# Altium PCB PowerBoard.PcbDoc
Units mm, origin at the board's own origin, x right, y up, seen from the top; angles counter-clockwise.
Board outline 152.4 x 101.6 mm, 4 copper layers (Top Layer, VBAT, GND, Bottom Layer), stack 0.778 mm thick; 147 components, 165 nets, 469 pads, 23 vias.
Unrouted connection lines stored in the file: 239.
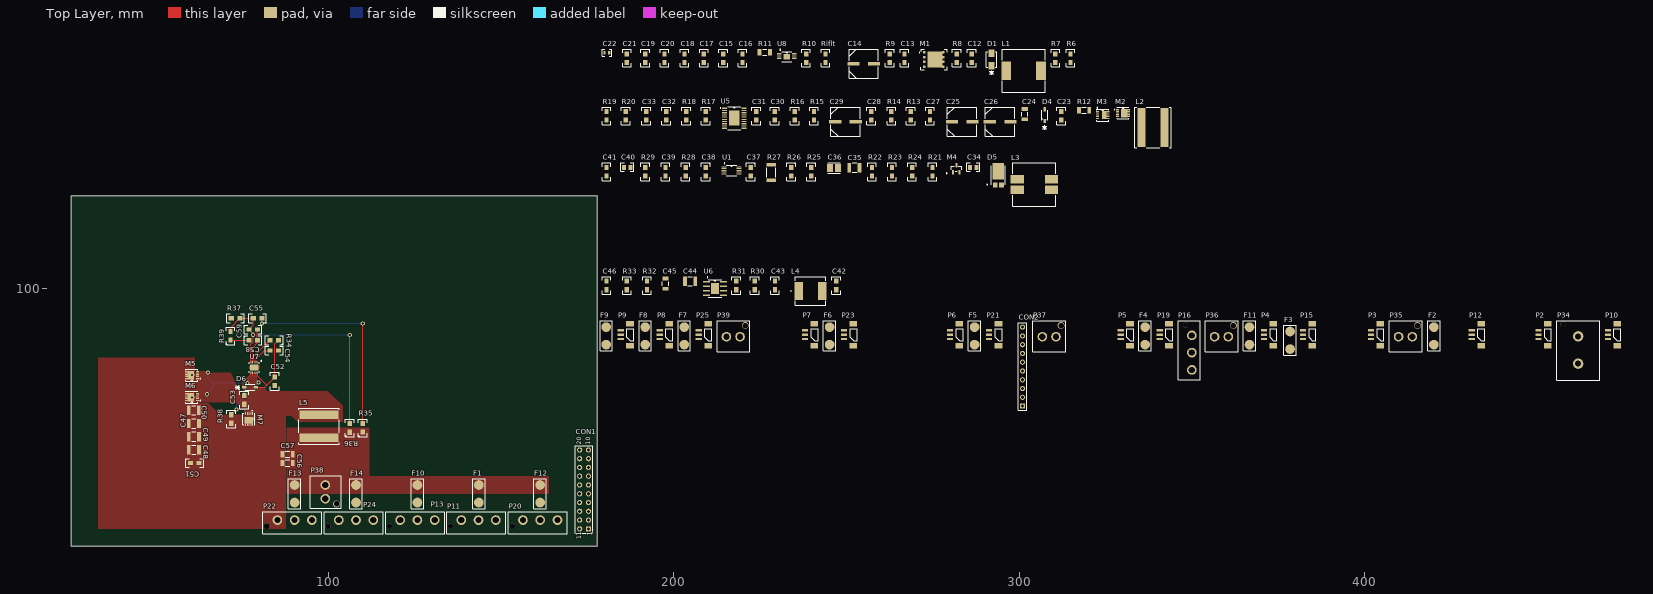
[diagram p0: Top Layer view]
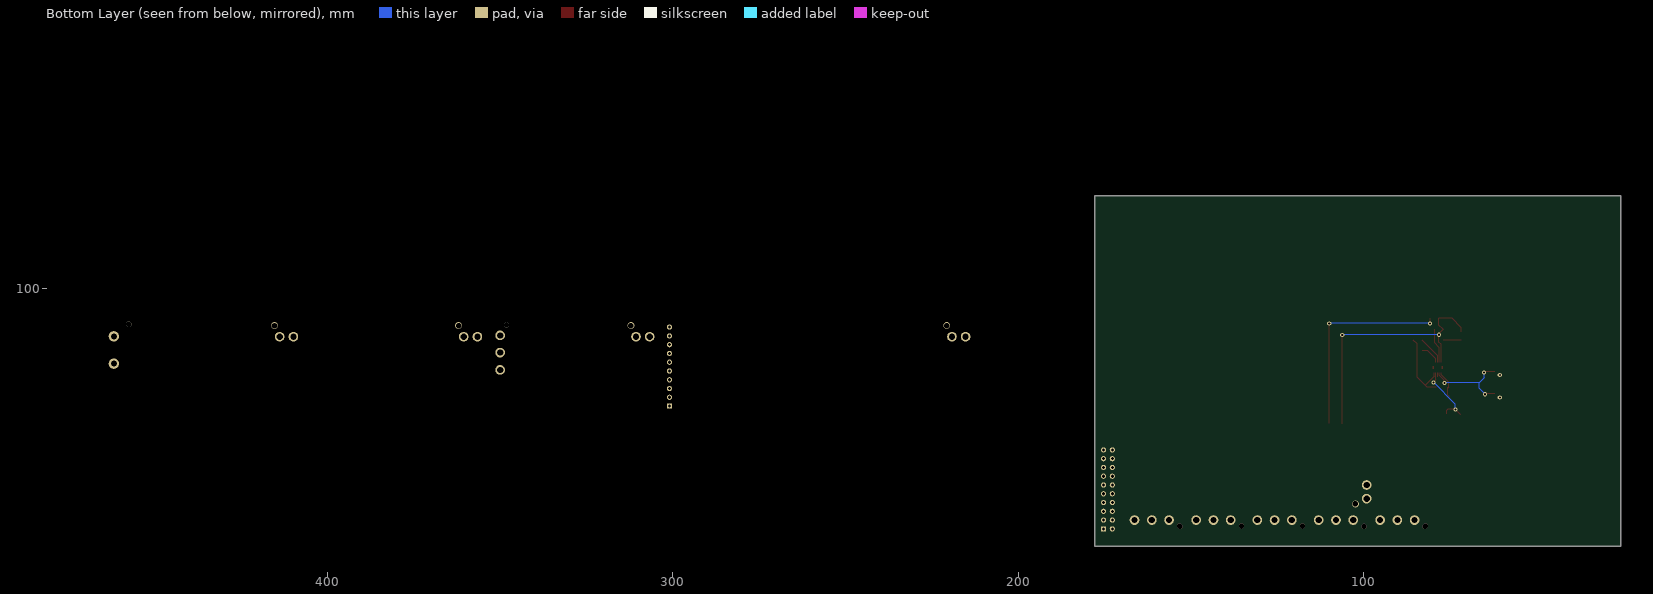
[diagram p1: Bottom Layer view, seen from below]
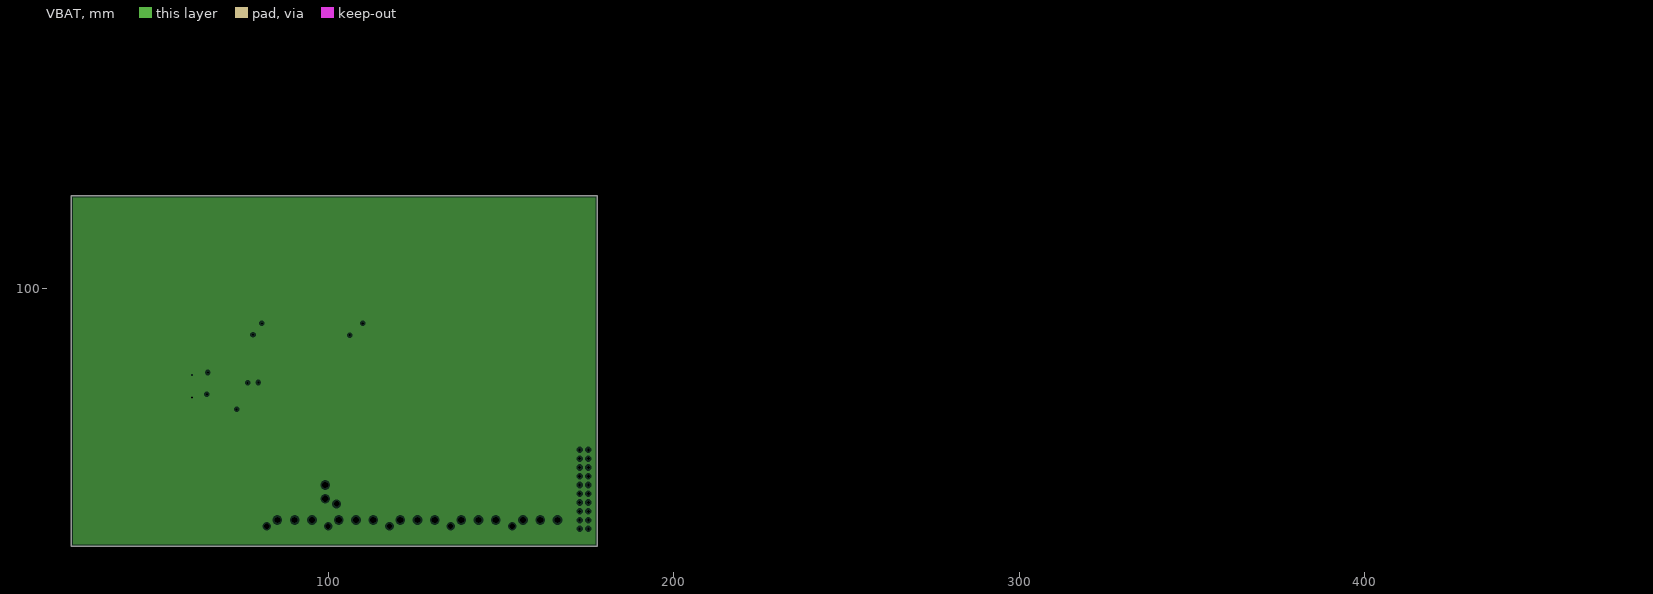
[diagram p2: VBAT, clearances drawn from the general rule]
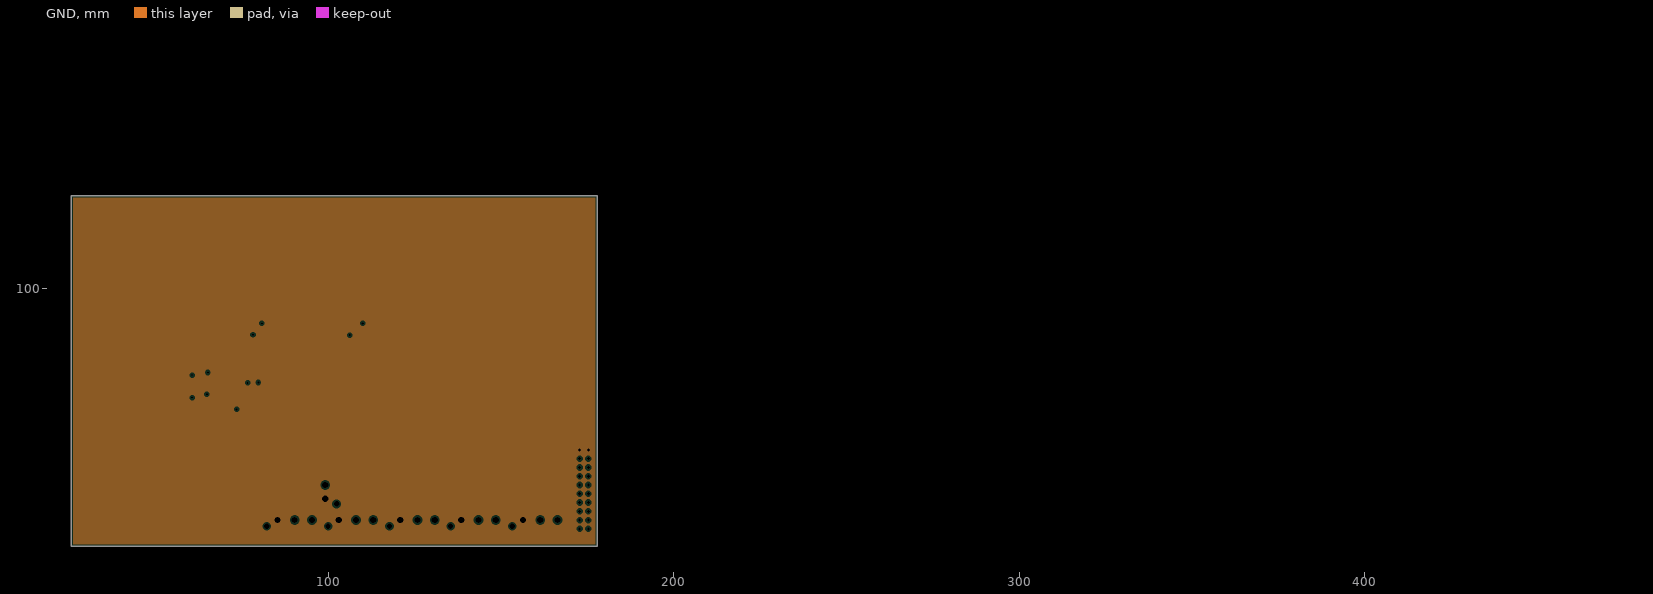
[diagram p3: GND, clearances drawn from the general rule]

## Layer stack, top to bottom
Top Solder: solder mask 0.0102, Solder Resist, Dk 3.5
Top Layer: signal copper 0.0356
Dielectric 1: core 0.254, FR-4, Dk 4.2
VBAT: plane copper 0.036, net VBAT
Dielectric 3: prepreg 0.127, Dk 4.2
GND: plane copper 0.036, net GND
Dielectric 2: core 0.254, Dk 4.2
Bottom Layer: signal copper 0.0356
Bottom Solder: solder mask 0.0102, Solder Resist, Dk 3.5

## Board outline
25.4,25.4 177.8,25.4 177.8,127 25.4,127

## Design rules (kind name [scope] priority, off if disabled: settings)
Clearance [All] p1: gap=0.2
PlaneClearance [All] p1: clearance=0.508
PlaneConnect [All] p1: planeconnectstyle=Relief reliefexpansion=0.508 reliefentries=4 reliefconductorwidth=0.254 reliefairgap=0.254
PolygonConnect [All] p1: connectstyle=Direct reliefconductorwidth=0.254 reliefentries=4 polygonreliefangle="90 Angle" airgapwidth=0.254
RoomDefinition Power24V [InComponentClass('Power24V')] p1: confinementstyle=ConfineIn formatcopy=TRUE lockcomponents=FALSE outline 178.9,156.7 316.699,156.7 316.699,172.2 178.9,172.2
RoomDefinition Power19V [InComponentClass('Power19V')] p2: confinementstyle=ConfineIn formatcopy=TRUE lockcomponents=FALSE outline 178.9,140.5 344.299,140.5 344.299,155.5 178.9,155.5
RoomDefinition Power12V [InComponentClass('Power12V')] p3: confinementstyle=ConfineIn formatcopy=TRUE lockcomponents=FALSE outline 178.9,123.7 311.599,123.7 311.599,139.3 178.9,139.3
RoomDefinition Power7V4 [InComponentClass('Power7V4')] p4: confinementstyle=ConfineIn formatcopy=TRUE lockcomponents=FALSE outline 25.511,25.241 174.011,25.241 174.011,95.491 25.511,95.491
RoomDefinition Power5V [InComponentClass('Power5V')] p5: confinementstyle=ConfineIn formatcopy=TRUE lockcomponents=FALSE outline 178.9,95 250.299,95 250.299,106.4 178.9,106.4
RoutingVias [All] p1: holewidth=0.6 width=1.2 viastyle="Through Hole" minholewidth=0.6 minwidth=1.2 maxholewidth=0.6 maxwidth=1.2
SolderMaskExpansion [All] p1: expansion=0.102
Width [All] p1: maxlimit=5 minlimit=0.254 preferedwidth=0.254
28 further rules are at their usual default settings.

## Classes and differential pairs
component class Power5V: C42 C43 C44 C45 C46 L4 R30 R31 R32 R33 U6
component class Power7V4: C47 C48 C49 C50 C51 C52 C53 C54 C55 C56 C57 C58 C59 D6 L5 M5 M6 M7 R34 R35 R36 R37 R38 R39 U7
component class Power12V: C34 C35 C36 C37 C38 C39 C40 C41 D5 L3 M4 R21 R22 R23 R24 R25 R26 R27 R28 R29 U1
component class Power19V: C23 C24 C25 C26 C27 C28 C29 C30 C31 C32 C33 D4 L2 M2 M3 R12 R13 R14 R15 R16 R17 R18 R19 R20 U5
component class Power24V: C12 C13 C14 C15 C16 C17 C18 C19 C20 C21 C22 D1 L1 M1 R6 R7 R8 R9 R10 R11 Riflt U8
component class Power: CON1 CON2 F1 F2 F3 F4 F5 F6 F7 F8 F9 F10 F11 F12 F13 F14 P2 P3 P4 P5 P6 P7 P8 P9 P10 P11 P12 P13 P15 P16 P19 P20 P21 P22 P23 P24 P25 P34 P35 P36 P37 P38 P39

## Components (designator, comment, footprint, x,y, rotation, side; value= is the part's Value field where it differs from the comment)
C12 "CC0805KRX7R9BB27" "0805 Cap" 286.299,166.8 r90 top
C13 "CC0805JRNPO9BN10" "0805 Cap" 266.799,166.8 r90 top
C14 "35SVPF82M" CAPSMT_62_E12 254.999,165.2 r0 top
C15 "GRM21BR61E475MA1" "0805 Cap" 214.3,166.8 r90 top
C16 "GRM21BR61E475MA1" "0805 Cap" 219.9,166.8 r90 top
C17 "GRM155R61A683KA0" "0805 Cap" 208.7,166.8 r90 top
C18 "GMK212B7105KG-T" "0805 Cap" 203.1,166.8 r90 top
C19 "EMK212B7474KD-T" "0805 Cap" 191.7,166.8 r90 top
C20 "CC0805JRNPO9BN15" "0805 Cap" 197.3,166.8 r90 top
C21 "CC0805JRNPO9BN10" "0805 Cap" 186.4,166.8 r90 top
C22 "C1608X5R1C105K" 1608 180.6,168.4 r0 top
C23 "C0805C224K5RACTU" "0805 Cap" 312.199,150.1 r90 top
C24 "C3216JB1E476M" 1206 301.599,150.6 r90 top
C25 "25SVPF180M" CAPSMT_62_E12 283.499,148.4 r0 top
C26 "25SVPF180M" CAPSMT_62_E12 294.499,148.4 r0 top
C27 "GRM21BC81E475KA1" "0805 Cap" 274.199,150.1 r90 top
C28 "CL21C431JBANNNC" "0805 Cap" 257.199,150.1 r90 top
C29 "20SVPF390M" CAPSMT_62_E12 249.7,148.4 r0 top
C30 "GRM188R71C474KA8" "0805 Cap" 229.2,150.1 r90 top
C31 "GRM216R71H103KA0" "0805 Cap" 223.9,150.1 r90 top
C32 "TMK212BJ474KD-T" "0805 Cap" 197.8,150.1 r90 top
C33 "GRM155R61A154KE1" "0805 Cap" 192,150.1 r90 top
C34 "GRM21BR61E475MA1" 0805 286.699,135.2 r0 top
C35 "GRM32ER61C226KE2" 1210 252.299,135.1 r0 top
C36 "TPSB226K020R0400" 3528-21 246.4,135 r0 top
C37 "GRM1555C1E301JA0" "0805 Cap" 222.3,133.9 r90 top
C38 "GRM155R61C104KA8" "0805 Cap" 209.2,133.9 r90 top
C39 "GRM155R71C224KA1" "0805 Cap" 197.6,133.9 r90 top
C40 "CC0805KRX7R9BB56" 0805 186.5,135.2 r0 top
C41 "C0603C0G1E110G" "0805 Cap" 180.5,133.9 r90 top
C42 "C1005X5R1A104K" "0805 Cap" 247,101 r90 top
C43 "GRM1555C1E5R1CA0" "0805 Cap" 229.3,101 r90 top
C44 "GRM32ER61E226KE1" 1210 204.7,102.2 r0 top
C45 "C3216X6S1A476M" 1206 197.6,101.5 r90 top
C46 "GRM155R61A474KE1" "0805 Cap" 180.5,101 r90 top
C47 "GRM32ER61E226KE1" 1210 60.985,61.001 r0 top
C48 "GRM32ER61E226KE1" 1210 60.985,53.381 r0 top
C49 "GRM32ER61E226KE1" 1210 60.985,57.191 r0 top
C50 "GRM32ER61E226KE1" 1210 60.985,64.811 r0 top
C51 "GRM188R61E105KA1" "0805 Cap" 61.234,49.571 r180 top
C52 "GRM188R61A225KE3" "0805 Cap" 84.411,73.231 r90 top
C53 "08053C104KAT2A" "0805 Cap" 75.554,67.821 r90 top
C54 "GRM033R71C332KA8" "0805 Cap" 84.261,82.131 r180 top
C55 "GRM155R71H182KA0" "0805 Cap" 79.431,91.481 r0 top
C56 "C3216X6S1A476M" 1206 88.113,49.571 r180 top
C57 "C3216X6S1A476M" 1206 88.113,52.111 r180 top
C58 "CC0805KRX7R9BB15" "0805 Cap" 78.161,85.131 r180 top
C59 "GRM1555C1H361JA0" "0805 Cap" 78.161,88.231 r180 top
CON1 "Header 10X2A" HDR2X10_CEN 175.26,30.48 r90 top
CON2 "Header 10" HDR1X10 300.99,66.04 r90 top
D1 "B240A-13-F" SMA 291.999,166.4 r90 top
D4 "MBR130T1G" SOD-123 307.399,150.3 r90 top
D5 "PDS760-13" PowerDI5 293.999,132.9 r0 top
D6 "MBR0540T1G" SOD-123 77.23,71.471 r0 top
F1 "RSTA 2-BULK" 56400001009 143.51,43.18 r270 top
F2 "RSTA 2-BULK" 56400001009 420.11,83.82 r90 top
F3 "RSTA 2-BULK" 56400001009 378.46,87.63 r270 top
F4 "RSTA 2-BULK" 56400001009 336.51,83.82 r90 top
F5 "RSTA 2-BULK" 56400001009 287.11,83.82 r90 top
F6 "RSTA 2-BULK" 56400001009 245.11,83.82 r90 top
F7 "RSTA 2-BULK" 56400001009 203.01,83.82 r90 top
F8 "RSTA 2-BULK" 56400001009 191.71,83.82 r90 top
F9 "RSTA 2-BULK" 56400001009 180.41,83.82 r90 top
F10 "RSTA 2-BULK" 56400001009 125.73,43.18 r270 top
F11 "RSTA 2-BULK" 56400001009 366.71,83.82 r90 top
F12 "RSTA 2-BULK" 56400001009 161.29,43.18 r270 top
F13 "RSTA 2-BULK" 56400001009 90.17,43.18 r270 top
F14 "RSTA 2-BULK" 56400001009 107.95,43.18 r270 top
L1 "SRR1210-220M" SRR1210 301.299,163.2 r0 top
L2 "XAL1010-682MEB" XAL1010 338.799,146.7 r0 top
L3 "DRQ127-3R3-R" DRQ127 304.399,130.2 r0 top
L4 "IHLP3232DZER3R3M" IHLP-3232DZ 239.6,99.4 r0 top
L5 "XAL1010-681MEB" XAL1010 97.231,60.214 r270 top
M1 "CSD17551Q5A" TRANS_NexFET_Q5A 275.299,166.4 r0 top
M2 "CSD16340Q3" TRANS_NexFET_Q3 330.099,150.9 r0 top
M3 "BSZ035N03MS G" PG-TSDSON-8 324.199,150.3 r0 top
M4 "SI2316BDS-T1-E3" SOT-23 281.799,134.8 r0 top
M5 "CSD16340Q3" TRANS_NexFET_Q3 60.401,74.971 r180 top
M6 "CSD16340Q3" TRANS_NexFET_Q3 60.401,68.621 r180 top
M7 "CSD16340Q3" TRANS_NexFET_Q3 76.911,62.271 r270 top
P2 "DF13-3" DF13-3 450.41,86.72 r90 top
P3 "DF13-3" DF13-3 401.91,86.72 r90 top
P4 "DF13-3" DF13-3 370.91,86.72 r90 top
P5 "DF13-3" DF13-3 329.41,86.72 r90 top
P6 "DF13-3" DF13-3 280.01,86.72 r90 top
P7 "DF13-3" DF13-3 238.01,86.72 r90 top
P8 "DF13-3" DF13-3 195.91,86.72 r90 top
P9 "DF13-3" DF13-3 184.61,86.72 r90 top
P10 "DF13-3" DF13-3 470.51,86.72 r90 top
P11 "DF5A-3" DF5A-3 143.43,33.02 r180 top
P12 "DF13-3" DF13-3 431.11,86.72 r90 top
P13 "DF5A-3" DF5A-3 125.73,33.02 r180 top
P15 "DF13-3" DF13-3 382.21,86.72 r90 top
P16 "DF5A-3" DF5A-3 350.01,81.52 r90 top
P19 "DF13-3" DF13-3 340.71,86.72 r90 top
P20 "DF5A-3" DF5A-3 161.29,33.02 r180 top
P21 "DF13-3" DF13-3 291.31,86.72 r90 top
P22 "DF5A-3" DF5A-3 90.17,33.02 r180 top
P23 "DF13-3" DF13-3 249.31,86.72 r90 top
P24 "DF5A-3" DF5A-3 107.95,33.02 r180 top
P25 "DF13-3" DF13-3 207.21,86.72 r90 top
P34 "DF22-2" DF22-2 461.91,78.32 r90 top
P35 "DF22-2" DF63 409.91,86.12 r0 top
P36 "DF22-2" DF63 356.61,86.12 r0 top
P37 "DF22-2" DF63 306.71,86.12 r0 top
P38 "DF22-2" DF63 99.06,43.18 r270 top
P39 "DF22-2" DF63 215.21,86.12 r0 top
R6 "CRCW04021K40FKED" "0805 Resistor" 314.899,166.8 r90 top
R7 "RR1220P-473-D" "0805 Resistor" 310.499,166.8 r90 top
R8 "CRCW040256K2FKED" "0805 Resistor" 281.899,166.8 r90 top
R9 "CRCW040217R8FKED" "0805 Resistor" 262.499,166.8 r90 top
R10 "CRCW0402316KFKED" "0805 Resistor" 238.3,166.8 r90 top
R11 "CSR1206FK25L0" 1206 226.3,168.5 r0 top
R12 "PRL1632-R005-F-T" 1206 318.799,151.7 r0 top
R13 "CRCW08053R01FKEA" "0805 Resistor" 268.599,150.1 r90 top
R14 "RR1220P-473-D" "0805 Resistor" 262.999,150.1 r90 top
R15 "CRCW040249K9FKED" "0805 Resistor" 240.6,150.1 r90 top
R16 "CRCW040239K2FKED" "0805 Resistor" 235,150.1 r90 top
R17 "CRCW04023K16FKED" "0805 Resistor" 209.2,150.1 r90 top
R18 "CRCW040210K0FKED" "0805 Resistor" 203.6,150.1 r90 top
R19 "CRCW040286K6FKED" "0805 Resistor" 180.5,150.1 r90 top
R20 "CRCW040219K6FKED" "0805 Resistor" 186.1,150.1 r90 top
R21 "CRCW040286K6FKED" "0805 Resistor" 274.899,133.9 r90 top
R22 "CRCW040215K0FKED" "0805 Resistor" 257.399,133.9 r90 top
R23 "CRCW04022K21FKED" "0805 Resistor" 263.199,133.9 r90 top
R24 "CRCW0402100RFKED" "0805 Resistor" 268.999,133.9 r90 top
R25 "CRCW040213K3FKED" "0805 Resistor" 239.8,133.9 r90 top
R26 "CRCW040210K0FKED" "0805 Resistor" 234,133.9 r90 top
R27 "CSRN2010FK50L0" 2010 228.2,133.7 r90 top
R28 "CRCW04022K37FKED" "0805 Resistor" 203.4,133.9 r90 top
R29 "CRCW040273K2FKED" "0805 Resistor" 191.7,133.9 r90 top
R30 "CRCW040210K0FKED" "0805 Resistor" 223.4,101 r90 top
R31 "CRCW0402365KFKED" "0805 Resistor" 218.1,101 r90 top
R32 "CRCW0402100KFKED" "0805 Resistor" 192.2,101 r90 top
R33 "CRCW040249K9FKED" "0805 Resistor" 186.4,101 r90 top
R34 "CRCW0402100KFKED" "0805 Resistor" 84.261,85.131 r0 top
R35 "CRCW0402261RFKED" "0805 Resistor" 109.931,59.751 r270 top
R36 "CRCW040210K0FKED" "0805 Resistor" 106.121,59.711 r270 top
R37 "CRCW0402887RFKED" "0805 Resistor" 73.081,91.481 r0 top
R38 "CRCW04024K42FKED" "0805 Resistor" 71.831,62.291 r90 top
R39 "CRCW04021K21FKED" "0805 Resistor" 71.611,86.381 r270 top
Riflt "CRCW04021K00FKED" "0805 Resistor" 243.9,166.8 r90 top
U1 "LM5022MM/NOPB" MUB10A 216.7,134.3 r0 top
U5 "LM5122MH/NOPB" MXA20A 217.5,149.4 r0 top
U6 "TPS56528DDAR" R-PDSO-G8 211.9,100.1 r0 top
U7 "TPS40304DRCR" S-PVSON-N10 78.486,77.216 r270 top
U8 "TPS40210DGQR" S-PDSO-G10 232.7,167.2 r0 top

## Footprints (in the part's own frame and the unit in brackets; to place one, negate y for a bottom-side part, rotate by r counter-clockwise, add the part's x,y. Pads: shape width x height; smd on the part's side, far side on the other; paste and mask are expansions set on the pad)
0805 [mil]
  rect 44x57 smd: 1(-35.5,0) 2(35.5,0)
  silkscreen extent -75,-45 75,50
"0805 Cap" [mm] "0805 Capacitor"
  rect 1.5x1.25 smd: 1(1.25,0) 2(-1.25,0)
  silkscreen extent -2.54,-1.27 2.54,1.27, body extent -1,-0.63 1.1,0.63, height 0.9
"0805 Resistor" [mm] "0805 Resistor"
  rect 1.5x1.25 smd: 1(1.25,0) 2(-1.25,0)
  silkscreen extent -2.54,-1.27 2.54,1.27, body extent -1,-0.63 1.1,0.63, height 0.6
1206 [mil]
  rect 44x71 smd: 1(-59,0) 2(59,0)
  silkscreen extent -24,-36 24,36
1210 [mil]
  rect 44x106 smd: 1(-59,0) 2(59,0)
  silkscreen extent -24,-53 24,53
1608 [mil]
  rect 26x38 smd: 1(-27.5,0) 2(27.5,0)
  silkscreen extent -55,-40 55,40
2010 [mil]
  rect 40x106 smd: 1(-88.5,0) 2(88.5,0)
  silkscreen extent -55,-53 55,53
3528-21 [mil]
  rect 69x91 smd: 1(-44.5,0) 2(44.5,0)
  silkscreen extent -73,-59 73,59
56400001009 [mm] "FUSE HOLDER RADIAL 250V 6.3A SMD"
  round 2.8 smd: 1(0,0) 2(5.08,0)
  silkscreen extent -1.8,-1.8 6.9,1.8
CAPSMT_62_E12 [mil]
  rect 140x43 smd: 1(-117,0) 2(117,0)
  silkscreen extent -168,-168 168,168
DF5A-3 [mm]
  round 2.8 hole 1.8: 1(-5,0) 2(0,0) 3(5,0)
  silkscreen extent -7.9,-2.4 9.2,4
DF13-3 [mm] "Part number: DF13C-3P-1.25V(21)"
  rect 0.7x1.8 smd: 1(-1.25,0) 2(0,0) 3(1.25,0)
  rect 1.6x2.2 smd: NC(-3.2,-2.7) NC(3.2,-2.7)
  silkscreen extent -1.75,-3.75 1.75,-1.75
DF22-2 [mm] "CONN HEADER 2POS 7.92MM PCB TIN"
  round 3 hole 1.7: 1(0,0) 2(7.92,0)
  silkscreen extent -4.75,-6.22 12.47,6.25
DF63 [mm]
  round 2.8 hole 1.8: 1(0,0) 2(3.96,0)
  silkscreen extent -2.7,-4.4 6.8,4.6
DRQ127 [mil]
  rect 152x98 smd: 1(-196,59) 2(-196,-59) 3(196,-59) 4(196,59)
  silkscreen extent -246,-246 246,246
HDR1X10 [mm] "Connector; Header; 10 Position"
  rect 1.5x1.5 hole 0.9: 1(0,0)
  round 1.5 hole 0.9: 2(2.54,0) 3(5.08,0) 4(7.62,0) 5(10.16,0) 6(12.7,0) 7(15.24,0) 8(17.78,0) 9(20.32,0) 10(22.86,0)
  silkscreen extent -1.27,-1.27 24.13,1.27
HDR2X10_CEN [mm] "Connector; Header; 10x2 Position"
  rect 1.5x1.5 hole 0.9: 1(0,0)
  round 1.5 hole 0.9: 2(2.54,0) 3(5.08,0) 4(7.62,0) 5(10.16,0) 6(12.7,0) 7(15.24,0) 8(17.78,0) 9(20.32,0) 10(22.86,0) 11(0,2.54) 12(2.54,2.54) 13(5.08,2.54) 14(7.62,2.54) 15(10.16,2.54) 16(12.7,2.54) 17(15.24,2.54) 18(17.78,2.54) 19(20.32,2.54) 20(22.86,2.54)
  silkscreen extent -1.27,-1.27 24.13,3.81
IHLP-3232DZ [mil]
  rect 95x203 smd: 1(-133.5,0) 2(133.5,0)
  silkscreen extent -228,-162 175,162
MUB10A [mil]
  rect 54x13 smd: 1(-86.5,39.37) 2(-86.5,19.69) 3(-86.5,0) 4(-86.5,-19.68) 5(-86.5,-39.37) 6(86.5,-39.37) 7(86.5,-19.68) 8(86.5,0) 9(86.5,19.69) 10(86.5,39.37)
  silkscreen extent -85,-61 61,85
MXA20A [mil]
  rect 56x14 smd: 1(-112,115.16) 2(-112,89.57) 3(-112,63.98) 4(-112,38.39) 5(-112,12.8) 6(-112,-12.8) 7(-112,-38.39) 8(-112,-63.98) 9(-112,-89.57) 10(-112,-115.16) 11(112,-115.16) 12(112,-89.57) 13(112,-63.98) 14(112,-38.39) 15(112,-12.8) 16(112,12.8) 17(112,38.39) 18(112,63.98) 19(112,89.57) 20(112,115.16)
  rect 124x171 smd: 21(0,0)
  silkscreen extent -160,-130 74,130
PG-TSDSON-8 [mil]
  rect 31x13 smd paste-6.5: 1(-59.5,38.39) 2(-59.5,12.8) 3(-59.5,-12.8) 4(-59.5,-38.39) 5(59.5,-38.39) 6(59.5,-12.8) 7(59.5,12.8) 8(59.5,38.39)
  rect 52x90 smd paste-26 mask+1: 9(18,0)
  Top Layer region: -75,0 -75,0 -75,0 -75,0
  silkscreen extent -67,-67 67,90
PowerDI5 [mil]
  rect 55x55 smd: 1(-36.22,-112.5) 2(36.22,-112.5)
  rect 132x191 smd: 3(0,44.5)
  silkscreen extent -134,-111 80,108
R-PDSO-G8 [mil]
  rect 78x18.14 smd: 1(-97,75) 2(-97,25) 3(-97,-25) 4(-97,-75) 5(97,-75) 6(97,-25) 7(97,25) 8(97,75)
  rect 94x122 smd paste-60.5: 9(0,0)
  silkscreen extent -90,-98 78,135
S-PDSO-G10 [mm]
  rect 1.411x0.27 smd: 1(-2.175,1) 2(-2.175,0.5) 3(-2.175,0) 4(-2.175,-0.5) 5(-2.175,-1) 6(2.175,-1) 7(2.175,-0.5) 8(2.175,0) 9(2.175,0.5) 10(2.175,1)
  rect 1.88x1.57 smd paste-0.927: 11(0,0)
  silkscreen extent -2.03,-1.5 1.5,2.16
S-PVSON-N10 [mm]
  rect 0.8x0.23 smd: 1(-1.5,1) 2(-1.5,0.5) 3(-1.5,0) 4(-1.5,-0.5) 5(-1.5,-1) 6(1.5,-1) 7(1.5,-0.5) 8(1.5,0) 9(1.5,0.5) 10(1.5,1)
  rect 1.75x2.4 smd paste-1.187: 11(0,0)
  Top Layer region: -0.365,1.2 0.365,1.2 0.365,1.5 0.135,1.5 0.135,1.2 -0.135,1.2 -0.135,1.5 -0.365,1.5
  Top Layer region: -0.365,-1.2 0.365,-1.2 0.365,-1.5 0.135,-1.5 0.135,-1.2 -0.135,-1.2 -0.135,-1.5 -0.365,-1.5
  silkscreen extent -2.03,-1.5 1.5,2.16
SMA [mil]
  rect 86x64 smd: 1(-73,0) 2(73,0)
  silkscreen extent -174,-58 90,58
SOD-123 [mil]
  rect 48x30 smd: 1(-66,0) 2(66,0)
  silkscreen extent -165,-36 56,36
SOT-23 [mil]
  rect 22x50 smd: 1(-37.5,-41) 2(37.5,-41) 3(0,41)
  silkscreen extent -115,-57 60,28
SRR1210 [mil]
  rect 110x209 smd: 1(-198.5,0) 2(198.5,0)
  silkscreen extent -246,-246 246,246
TRANS_NexFET_Q3 [mil]
  rect 34x16 smd: 1(-62,38.39) 2(-62,12.8) 3(-62,-12.8) 4(-62,-38.39) 5(62,-38.39) 6(62,-12.8) 7(62,12.8) 8(62,38.39)
  rect 74.8x96.46 smd: 9(13.46,0)
  Top Layer region: 67,0 67,0 67,0 67,0
  silkscreen extent -99,-67 67,67
TRANS_NexFET_Q5A [mm]
  rect 0.8x0.7 smd paste-0.387: 1(-2.752,2.055) 2(-2.752,0.685) 3(-2.752,-0.685) 4(-2.752,-2.055) 5(2.752,-2.055) 6(2.752,-0.685) 7(2.752,0.685) 8(2.752,2.055)
  rect 4.3x4.56 smd paste-2.267 mask+0.025: 9(0.3,0)
  silkscreen extent -4.22,-2.92 3.81,2.92
XAL1010 [mil]
  rect 94x445 smd: 1(-131,0) 2(131,0)
  silkscreen extent -207,-232 207,232

## Part data
C12 C13 C14 C15 C16 C17 C18 C19 C20 C21 C22 C23 C24 C25 C26 C27 C28 C29 C30 C31 C32 C33 C34 C35 C36 C37 C38 C39 C40 C41 C42 C43 C44 C45 C46 C47 C48 C49 C50 C51 C52 C54 C55 C58 C59 D1 D4 D5 L1 L2 L3 L4 L5 M1 M2 M3 M4 M5 M6 M7 R6 R7 R8 R9 R10 R11 R12 R13 R14 R15 R16 R17 R18 R19 R20 R21 R22 R23 R24 R25 R26 R27 R28 R29 R30 R31 R32 R33 Riflt U1 U5 U6 U8: "Imported"
CON1: "Header, 10-Pin, Dual row"
CON2: "Header, 10-Pin"
F1 F2 F3 F4 F5 F6 F7 F8 F9 F10 F11 F12 F13 F14: "FUSE 2A 250/277V RADIAL"
P34 P35 P36 P37 P38 P39: "CONN HEADER 2POS 7.92MM PCB TIN"

## Via types
v1: diameter 1.2, hole 0.6, Top Layer to Bottom Layer, 11 vias
v2: diameter 1.5, hole 1.5, Top Layer to Bottom Layer, 6 vias
v3: diameter 2, hole 1.6, Top Layer to Bottom Layer, 5 vias
v4: diameter 1.6, hole 1.6, Top Layer to Bottom Layer, 1 vias

## Nets (pads, with @x,y where several pads share a name; then routed paths per layer and width w, separated by ;. In a path a pad name is that pad's centre, name@x,y a point inside that pad or via, vN(x,y) a via of type N, cw(c..) or ccw(c..) an arc to the next point about the centre after c; other vN are vias at no path point)
3V3: 
5V: 
5V-HC: C43.1 C45.1 F2.2 F3.1 F4.1 F5.1 F6.1 F7.1 F8.1 F9.1 L4.2 P39.1 R31.1
7V4: C56.1 C57.1 F1.1 F10.1 F11.1 F12.1 F13.1 F14.1 L5.2 P38.1 R35.1 R36.1
12V: C35.1 D5.3 P37.1 R21.1
19V: C24.1 C25.1 C26.1 M2.5 M2.6 M2.7 M2.8 M2.9 P36.1 R14.1
24V: C14.1 C18.1 D1.1 P35.1 R7.1
ENC_A0: 
ENC_A1: 
ENC_A2: 
ENC_A3: 
ENC_A4: 
ENC_A5: 
ENC_B0: 
ENC_B1: 
ENC_B2: 
ENC_B3: 
ENC_B4: 
ENC_B5: 
GND: C14.2 C15.2 C16.2 C17.2 C18.2 C19.2 C20.2 C21.2 C22.2 C24.2 C25.2 C26.2 C27.1 C29.2 C30.2 C32.2 C33.2 C35.2 C36.2 C37.2 C38.2 C39.2 C44.2 C45.2 C46.2 C47.2 C48.2 C49.2 C50.2 C51.2 C52.2 C54.2 C56.2 C57.2 CON1.10 CON1.20 CON2.10 L3.2 M3.1 M3.2 M3.3 M7.5 M7.6 M7.7 M7.8 M7.9 P2.3 P3.3 P4.3 P5.3 P6.3 P7.3 P8.3 P9.3 P10.3 P11.3 P12.3 P13.3 P15.3 P16.3 P19.3 P20.3 P21.3 P22.3 P23.3 P24.3 P25.3 P34.2 P35.2 P36.2 P37.2 P38.2 P39.2 R6.2 R11.1 R17.2 R18.1 R19.1 R20.1 R22.1 R26.2 R27.2 R28.1 R33.2 R37.2 R38.2 U1.6 U5.2 U5.9 U5.13 U5.15 U5.21 U6.5 U6.9 U7.11 U8.6 U8.11
M\C\L\R\: 
NetC6_2: 
NetC7_2: 
NetC8_2: 
NetC9_1: 
NetC10_1: 
NetC12_1: C12.1 C13.1 U8.4
NetC12_2: C12.2 R8.1
NetC13_2: C13.2 R6.1 R7.2 R8.2 U8.5
NetC17_1: C17.1 U8.2
NetC20_1: C20.1 Riflt.2 U8.7
NetC21_1: C21.1 R10.2 U8.1
NetC22_1: C22.1 U8.9
NetC23_1: C23.1 D4.1 U5.20
NetC23_2: C23.2 L2.2 M2.1 M2.2 M2.3 M3.5 M3.6 M3.7 M3.8 M3.9 U5.18
NetC27_2: C27.2 D4.2 U5.17
NetC28_1: C28.1 C31.1 R14.2 R17.1 U5.10
NetC28_2: C28.2 R16.1 U5.11
NetC30_1: C30.1 R13.1 U5.5
NetC31_2: C31.2 R16.2
NetC32_1: C32.1 U5.14
NetC33_1: C33.1 U5.7
NetC34_1: C34.1 D5.1 D5.2 L3.4
NetC34_2: C34.2 L3.3 M4.3
NetC37_1: C37.1 R23.2 R24.1
NetC38_1: C38.1 U1.4
NetC39_1: C39.1 U1.10
NetC40_1: C40.1 C41.1 R21.2 R26.1 U1.2
NetC40_2: C40.2 R29.2
NetC41_2: C41.2 R29.1 U1.3
NetC42_1: C42.1 U6.7
NetC42_2: C42.2 L4.1 U6.6
NetC43_2: C43.2 R31.2 R33.1 U6.2
NetC46_1: C46.1 R32.1 U6.3
NetC52_1: C52.1 D6.2 R34.1 U7.10 | length 22.7
  Top Layer w0.254: D6.2 81.554,71.471 82.154,72.071 ; U7.10 79.486,74.739 82.154,72.071 ; R34.1 84.411,84.031 C52.1 84.411,74.328 82.154,72.071
NetC53_1: C53.1 D6.1 U7.6 | length 8.5
  Top Layer w0.254: C53.1@75.184,68.581 75.184,68.871 75.554,69.241 D6.1@75.554,71.248 ; D6.1 D6.1@75.554,71.248 ; U7.6 77.486,75.106 75.354,72.974 75.354,71.448 D6.1@75.554,71.248
NetC53_2: C53.2 L5.1 M5.1 M5.2 M5.3 M6.1 M6.2 M6.3 M7.1 M7.2 M7.3 U7.8 | length 1.2
  Top Layer w0.3: 78.486,74.503 U7.8
NetC54_1: C54.1 U7.2 | length 6.1
  Top Layer w0.254: U7.2 78.986,79.806 81.311,82.131 C54.1
NetC55_1: C55.1 R35.2 | length 59.7
  Top Layer w0.254: v1(80.681,89.981) C55.1 ; R35.2 v1@109.931,90
  Bottom Layer w0.254: v1(80.681,89.981) 109.881,89.981 v1(109.9,90)
NetC55_2: C55.2 C59.1 R36.2 R37.1 R39.2 U7.5 | length 76.4
  Top Layer w0.254: R39.2 71.611,88.761 R37.1 C55.2 78.181,89.501 C59.1 78.111,87.031 78.111,84.494 77.511,83.894 77.511,78.741 U7.5 ; R36.2 v1(106.121,86.579)
  Bottom Layer w0.254: v1(78.1,86.7) v1@106,86.7
NetC58_1: C58.1 R39.1 | length 5.3
  Top Layer w0.254: R39.1 C58.1
NetC58_2: C58.2 C59.2 U7.4 | length 10.1
  Top Layer w0.254: U7.4 77.986,82.906 79.411,84.331 C58.2 C59.2
NetD1_2: D1.2 L1.2 M1.5 M1.6 M1.7 M1.8 M1.9
NetD2_1: 
NetD3_1: 
NetF1_2: F1.2 P11.2
NetF2_1: F2.1 P2.2
NetF3_2: F3.2 P3.2
NetF4_2: F4.2 P4.2
NetF5_2: F5.2 P5.2
NetF6_2: F6.2 P6.2
NetF7_2: F7.2 P7.2
NetF8_2: F8.2 P8.2
NetF9_2: F9.2 P9.2
NetF10_2: F10.2 P13.2
NetF11_2: F11.2 P16.2
NetF12_2: F12.2 P20.2
NetF13_2: F13.2 P22.2
NetF14_2: F14.2 P24.2
NetL2_1: L2.1 R12.2 U5.3
NetM1_1: M1.1 M1.2 M1.3 R11.2 Riflt.1
NetM1_4: M1.4 R9.1
NetM2_4: M2.4 U5.19
NetM3_4: M3.4 U5.16
NetM4_1: M4.1 U1.5
NetM4_2: M4.2 R24.2 R27.1
NetM5_4: M5.4 M6.4 U7.7 | length 27.2
  Top Layer w0.254: M6.4 64.629,69.596 v1(64.754,69.471) ; M5.4 64.879,75.946 v1(65.054,75.771) ; v1(76.554,72.771) 76.554,73.474 77.986,74.906 U7.7
  Bottom Layer w0.254: v1(64.754,69.471) 66.494,71.211 66.494,72.831 ; v1(65.054,75.771) 65.054,74.271 66.494,72.831 ; v1(76.554,72.771) 66.554,72.771 66.494,72.831
NetM7_4: M7.4 R38.1 U7.9 | length 19.4
  Top Layer w0.254: R38.1 73.461,65.171 75.554,65.171 75.936,64.789 M7.4 ; U7.9 78.986,73.703 79.654,73.035 v1(79.654,72.871)
  Bottom Layer w0.254: v1(73.354,65.071) 73.354,66.571 v1(79.654,72.871)
NetP26_2: 
NetP26_3: 
NetP27_2: 
NetP27_3: 
NetR4_1: 
NetR5_1: 
NetR9_2: R9.2 U8.8
NetR15_1: R15.1 R18.2 U5.6
NetR19_2: R19.2 U5.12
NetR20_2: R20.2 U5.8
NetR22_2: R22.2 U1.9
NetR23_1: R23.1 U1.8
NetR25_1: R25.1 R28.2 U1.7
NetR30_1: R30.1 U6.1
NetR32_2: R32.2 U6.4
NetR34_2: R34.2 U7.3 | length 8.3
  Top Layer w0.254: U7.3 78.486,80.606 R34.2
NetU3_18: 
NetU3_19: 
PGEC: 
PGED: 
PWR_SA0: CON1.8 P11.1
PWR_SA1: CON1.9 P13.1
PWR_SA2: CON1.11 P16.1
PWR_SA3: CON1.12 P20.1
PWR_SA4: CON1.13 P22.1
PWR_SA5: CON1.14 P24.1
PWR_SC0: CON2.1 P2.1
PWR_SC1: CON2.2 P3.1
PWR_SC2: CON2.3 P4.1
PWR_SC3: CON2.4 P5.1
PWR_SC4: CON2.5 P6.1
PWR_SC5: CON2.6 P7.1
PWR_SC6: CON2.7 P8.1
PWR_SC7: CON2.8 P9.1
PWR_SD0: CON1.1 P10.1
PWR_SD1: CON1.2 P12.1
PWR_SD2: CON1.3 P15.1
PWR_SD3: CON1.4 P19.1
PWR_SD4: CON1.5 P21.1
PWR_SD5: CON1.6 P23.1
PWR_SD6: CON1.7 P25.1
RX0: 
RX1: 
SA0: 
SA1: 
SA2: 
SA3: 
SA4: 
SA5: 
SA6: 
SA7: 
SC0: 
SC1: 
SC2: 
SC3: 
SC4: 
SC5: 
SC6: 
SC7: 
SD0: 
SD1: 
SD2: 
SD3: 
SD4: 
SD5: 
SD6: 
SP0: 
SP1: 
SP2: 
SP3: 
SP4: 
SP5: 
SP6: 
SP7: 
TX0: 
TX1: 
VBAT: C15.1 C16.1 C19.1 C29.1 C36.1 C44.1 C47.1 C48.1 C49.1 C50.1 C51.1 L1.1 L3.1 M5.5 M5.6 M5.7 M5.8 M5.9 M6.5 M6.6 M6.7 M6.8 M6.9 P34.1 R10.1 R12.1 R13.2 R15.2 R25.2 R30.2 U1.1 U5.4 U6.8 U7.1 U8.10
  other v1: 60.5,68.5 60.5,75
pads on no net: CON1.15 CON1.16 CON1.17 CON1.18 CON1.19 CON2.9 P2.NC P3.NC P4.NC P5.NC P6.NC P7.NC P8.NC P9.NC P10.2 P10.NC P12.2 P12.NC P15.2 P15.NC P19.2 P19.NC P21.2 P21.NC P23.2 P23.NC P25.2 P25.NC U5.1 U8.3
copper on no net:
  other v2: 82.095,31.22 99.875,31.22 117.655,31.22 135.355,31.22 153.215,31.22 348.21,89.595
  other v3: 102.31,37.72 220.67,89.37 312.17,89.37 362.07,89.37 415.37,89.37
  other v4: 457.56,89.69

## Polygon pours and split planes (outlines as drawn)
7V4 on Top Layer "Top Layer-No Net" (solid, pour order 8): 87.63,59.69 87.63,40.64 163.83,40.64 163.83,45.72 111.76,45.72 111.76,59.69 87.63,59.69
GND on Top Layer "Top Layer-No Net" (solid, pour order 6): 60.96,67.31 60.96,46.99 60.96,30.48 87.63,30.48 87.63,63.5 68.58,63.5 64.77,67.31
NetC53_2 on Top Layer "Top Layer-No Net" (solid, pour order 4): 61.214,75.692 61.214,67.097 66.04,67.097 73.152,67.097 75.438,64.811 75.438,63.287 89.154,63.287 90.932,61.509 104.14,61.509 104.14,66.081 99.822,70.399 82.296,70.399 81.808,70.886 78.74,74.717 78.232,74.717 76.454,72.939 76.454,68.367 74.93,68.367 71.628,75.692
VBAT on Top Layer "Top Layer-No Net" (solid, pour order 0): 61.214,77.511 61.214,30.48 33.274,30.48 33.274,80.051 61.214,80.051
VBAT on VBAT (split plane): 177.29,25.91 25.91,25.91 25.91,126.49 177.29,126.49
GND on GND (split plane): 177.29,25.91 25.91,25.91 25.91,126.49 177.29,126.49

## Text inside footprints (layer, text, board x,y; h text height)
CON1: Top Overlay "1" at 176.276,28.448 h1.27 r90; Top Overlay "1" at 173.228,27.432 h1.27 r90; Top Overlay "1" at 173.228,28.448 h1.27 r90; Top Overlay "10" at 175.768,54.864 h1.27 r90; Top Overlay "20" at 173.228,54.864 h1.27 r90